# EAGLE board Joystick Module A (EAGLE 9.0.0)
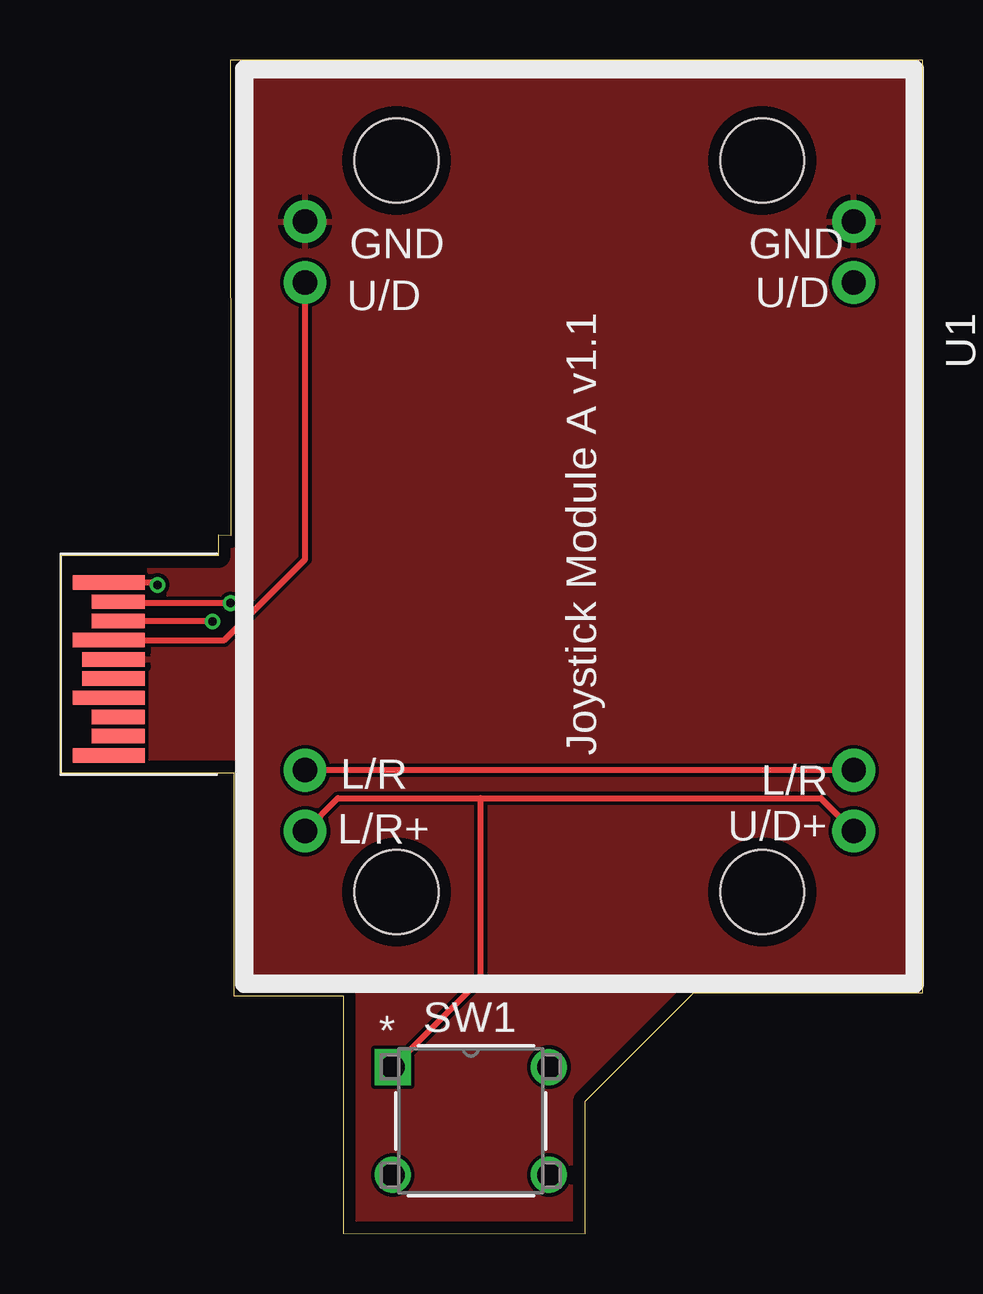
[diagram p0: board, top side]
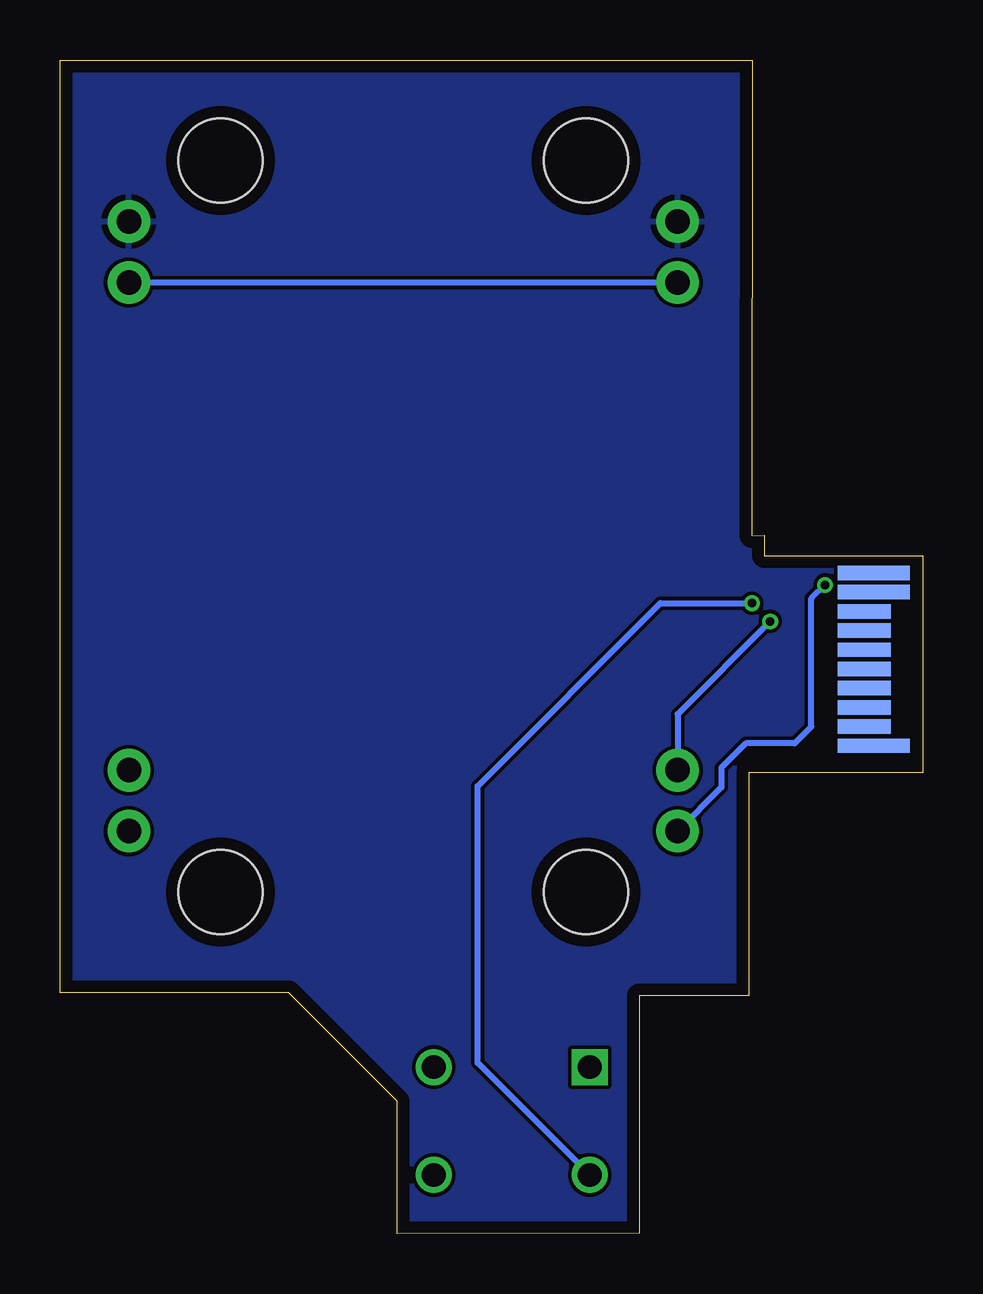
[diagram p1: board, bottom side, seen from below]

Size 35.94 x 48.91 mm. Coordinates in mm from the lower left corner, seen from the top.
Outline: 0,19.21 7.24,19.21 7.24,9.92 11.81,9.92 11.81,0.01 21.9,0 21.9,5.52 26.42,10.04 35.94,10.04 35.94,48.9 7.1,48.89 7.11,29.08 6.6,29.09 6.6,28.25 0,28.25 0,19.21
Copper layers (1*16): Top 0.035mm / dielectric 1.6mm / Bottom 0.035mm
Design rules "Elecrow_2-layer_PCB_eagle_rule": minimum track width 6mil, minimum drill 12mil, track to track 6mil, track to pad 6mil, pad to pad 6mil, via to via 8mil, smd to smd 0mil, copper to edge 20mil, drill to drill 10mil, minimum pad ring 6mil, minimum via ring 6mil, stop-mask expansion 0mil, vias tented up to drill 100mil, thermal gap 10mil

## Footprints (pad centres in the part's own frame; a part is rotated, then mirrored left to right if it is on the bottom)
SW4_1825910-G = drill 0.991 pad 1.499 square: 1 -6.502,4.496 | drill 0.991 pad 1.499: 2 0,4.496; 3 -6.502,0; 4 0,0
27800-JOYSTICK = drill 1.016 pad 1.778: 1 -11.43,12.7; 2 -11.43,10.16; 3 11.43,12.7; 4 11.43,10.16; 5 -11.43,-10.16; 6 -11.43,-12.7; 7 11.43,-10.16; 8 11.43,-12.7 | hole 3.5: -7.62,15.24; 7.62,15.24; -7.62,-15.24; 7.62,-15.24
EDGE_CONNECTOR_20POS_CONTACTS = smd 0.6 x 3 bottom: 1 -3.4,0; 9 3,0; 10 3.8,0 | smd 0.6 x 2.2 bottom: 2 -2.6,-0.4; 3 -1.8,-0.4; 4 -1,-0.4; 5 -0.2,-0.4; 6 0.6,-0.4; 7 1.4,-0.4; 8 2.2,-0.4 | smd 0.6 x 3: 11 3.4,0; 14 1,0; 17 -1.4,0; 20 -3.8,0 | smd 0.6 x 2.2: 12 2.6,-0.4; 13 1.8,-0.4; 18 -2.2,-0.4; 19 -3,-0.4 | smd 0.6 x 2.6: 15 0.2,-0.2; 16 -0.6,-0.2

## Placement (x,y rotation side)
SW1  2-1825910-7  [SW4_1825910-G]  20.37,2.45 0 top
U1  27800-JOYSTICK  [27800-JOYSTICK]  21.64,29.47 180 top
U$2  EDGE_CONNECTOR_20POS_CONTACTS  [EDGE_CONNECTOR_20POS_CONTACTS]  2.03,23.73 90 top

## Library data of the parts
SW1 = spst-tactile-switch; MANUFACTURER_PART_NUMBER: 218259107; VENDOR: TE Connectivity
U1 U$2 = thanics_robotics

## Nets
+3V3: SW1.1 U1.1 U1.3 U$2.11
GND: U1.6 U1.8 U$2.15
J2_SW: SW1.3 U$2.12
VRX: U1.2 U1.4 U$2.13
VRY: U1.5 U1.7 U$2.14

## Tracks (layer width: path | path; a pad name or v marks a point on that pad's centre or on a via)
+3V3  (via drill 0.35)
  Top 0.254: SW1.1 17.53,10.6 17.53,18.15 | 10.36,16.62 U1.3 11.58,18.15 17.53,18.15 | U1.1 31.7,18.15 17.53,18.15 | v4.06,27.04 3.97,27.13 U$2.11
  Bottom 0.254: U1.3 8.38,18.6 8.38,19.42 7.37,20.43 5.33,20.43 4.63,21.13 4.63,26.47 v4.06,27.04
GND
  pour Bottom: 3.56,51.17 3.56,-0.9 36.07,-0.4 36.07,51.67
  pour Top: 3.4,-0.65 36.53,-0.65 36.53,51.88 3.4,51.88
J2_SW  (via drill 0.35)
  Top 0.254: v7.11,26.27 2.49,26.27 U$2.12
  Bottom 0.254: SW1.3 18.54,7.12 18.54,18.65 10.92,26.27 v7.11,26.27
VRX  (via drill 0.35)
  Top 0.254: U1.2 U1.4 | U$2.13 6.33,25.53 v6.35,25.51
  Bottom 0.254: v6.35,25.51 10.21,21.65 U1.4
VRY
  Top 0.254: U$2.14 6.84,24.73 10.21,28.1 U1.7
  Bottom 0.254: U1.7 U1.5

## Text on the board
tNames: GND | GND | U/D | U/D | Joystick Module A v1.1 | L/R | L/R | L/R+ | U/D+